# EAGLE board Open_Sesame_circuitboard (EAGLE 9.6.2)
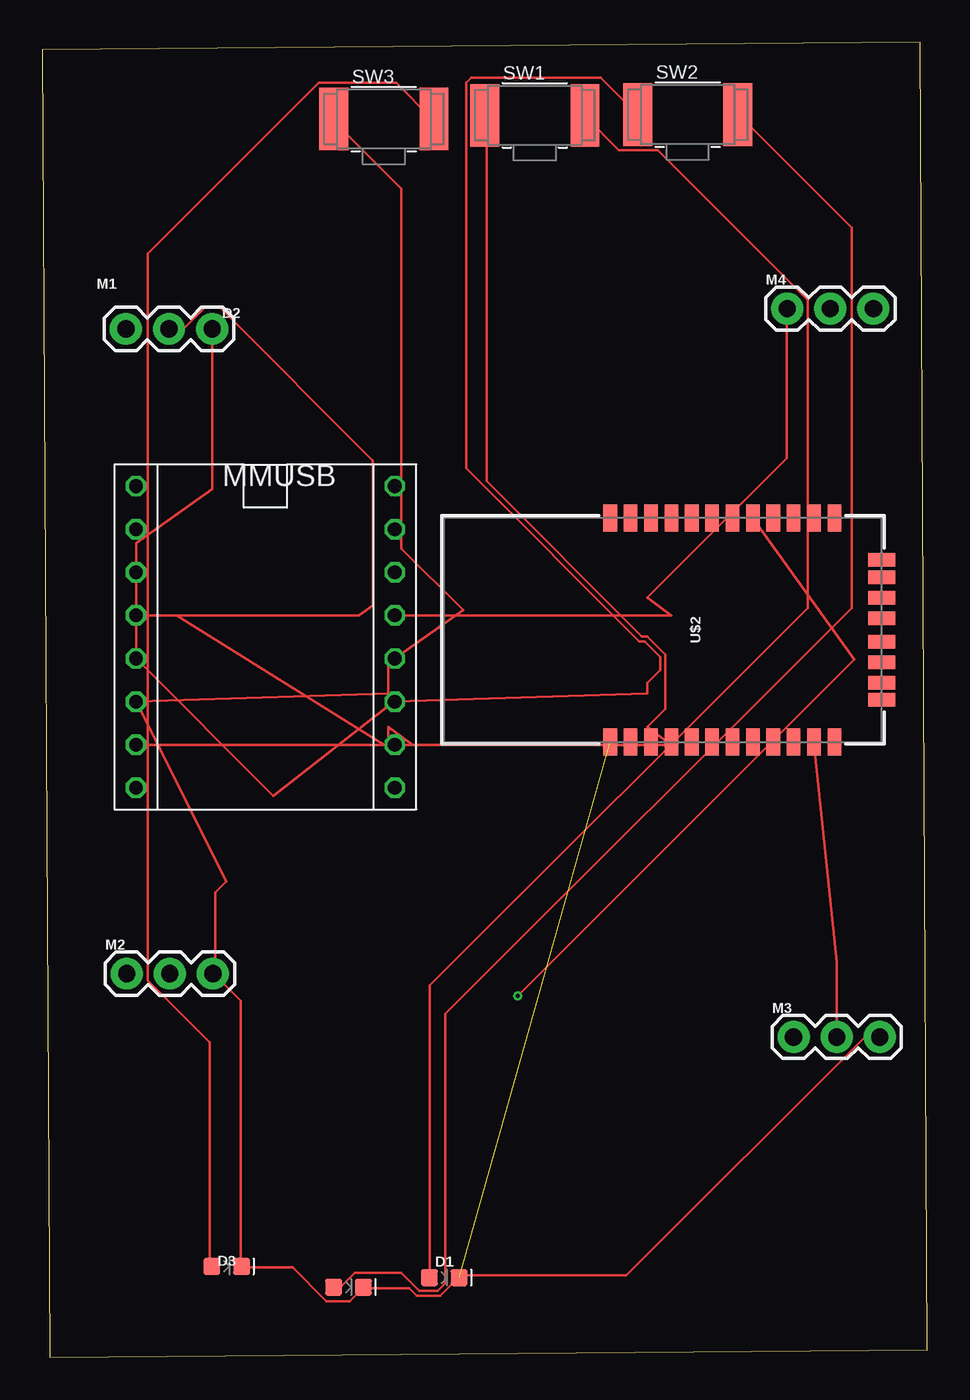
[diagram p0: board, top side]
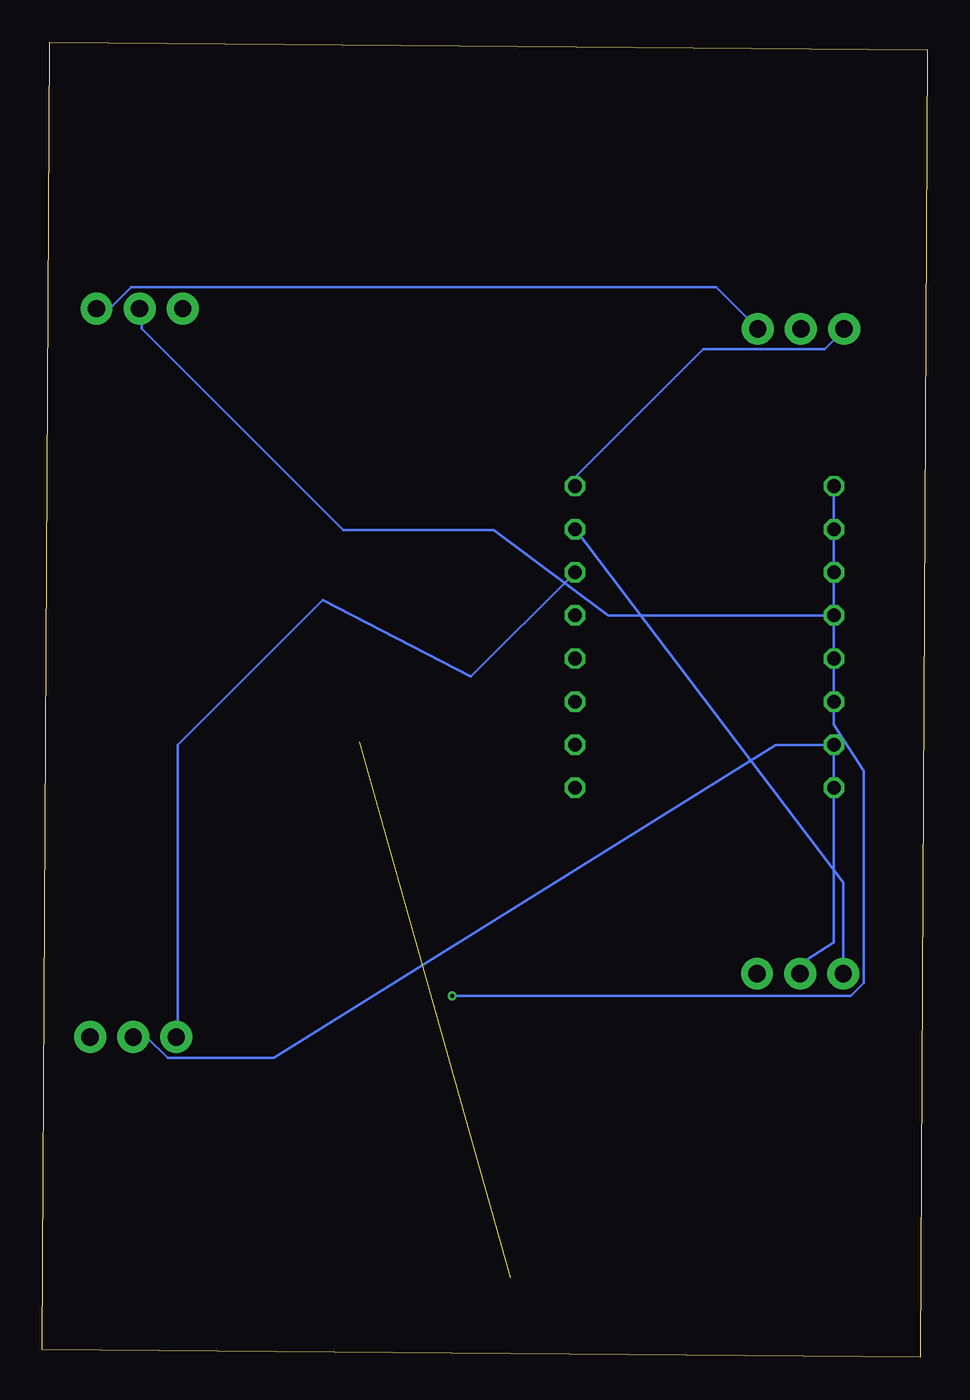
[diagram p1: board, bottom side, seen from below]

Size 52.12 x 77.45 mm. Coordinates in mm from the lower left corner, seen from the top.
Outline: 0.43,0 52.12,0.43 51.7,77.45 0,77.01 0.43,0
Copper layers (1*16): Top 0.035559375mm / dielectric 1.6mm / Bottom 0.035559375mm
Design rules "oshpark-2layer": minimum track width 6mil, minimum drill 10mil, track to track 6mil, track to pad 6mil, pad to pad 6mil, via to via 6mil, smd to smd 6mil, copper to edge 15mil, drill to drill 6mil, minimum pad ring 5mil, minimum via ring 5mil, stop-mask expansion 2.5mil, vias tented up to drill 0mil, thermal gap 10mil

## Footprints (pad centres in the part's own frame; a part is rotated, then mirrored left to right if it is on the bottom)
LED-0603 = smd 1 x 1: A -0.877,0; C 0.877,0
1X03 = drill 1.016 pad 1.88: 1 0,0; 2 2.54,0; 3 5.08,0
BTN_CK_KSS = smd 1.7 x 3.7: P$1 -2.95,0; P$2 2.95,0
VTC_LIB_METROMINISHEILD = drill 0.8 octagon: 3V -7.62,3.81; 5V -7.62,1.27; 6 7.62,-8.89; 7 7.62,-6.35; 8 7.62,-3.81; 9 7.62,-1.27; 10 7.62,1.27; 11 7.62,3.81; 12 7.62,6.35; 13 7.62,8.89; AREF -7.62,-8.89; GND -7.62,-1.27; GND2 -7.62,-3.81; RST -7.62,6.35; USB -7.62,8.89; VIN -7.62,-6.35
RN41 = smd 0.8 x 1.6: 1 -6.6,-6.6; 2 -5.4,-6.6; 3 -4.2,-6.6; 4 -3,-6.6; 5 -1.8,-6.6; 6 -0.6,-6.6; 7 0.6,-6.6; 8 1.8,-6.6; 9 3,-6.6; 10 4.2,-6.6; 11 5.4,-6.6; 12 6.6,-6.6; 13 6.6,6.6; 14 5.4,6.6; 15 4.2,6.6; 16 3,6.6; 17 1.8,6.6; 18 0.6,6.6; 19 -0.6,6.6; 20 -1.8,6.6; 21 -3,6.6; 22 -4.2,6.6; 23 -5.4,6.6; 24 -6.6,6.6 | smd 1.6 x 0.8: 28 9.4,3.1; 29 9.4,-3.1; 30 9.4,4.122; 31 9.4,1.9; 32 9.4,0.7; 33 9.4,-0.7; 34 9.4,-1.9; 35 9.4,-4.122

## Placement (x,y rotation side)
D1  Yellow  [LED-0603]  23.66,4.68 0 top
D2  Yellow  [LED-0603]  18.02,4.12 0 top
D3  Yellow  [LED-0603]  10.85,5.34 0 top
M1  SERVO  [1X03]  4.91,60.57 0 top
M2  SERVO  [1X03]  4.96,22.59 0 top
M3  SERVO  [1X03]  44.24,18.85 0 top
M4  SERVO  [1X03]  43.86,61.77 0 top
SW1  [BTN_CK_KSS]  29,73.15 0 top
SW2  [BTN_CK_KSS]  38,73.2 0 top
SW3  [BTN_CK_KSS]  20.11,72.94 0 top
U$1  VTC_LIB_METROMINISHIELD  [VTC_LIB_METROMINISHEILD]  13.13,42.42 0 top
U$2  BLUETOOTH-RN-41"  [RN41]  40.04,42.84 0 top

## Library data of the parts
D1-D3 = SparkFun-LED; PROD_ID: DIO-09003
M1-M4 = SparkFun-Electromechanical
SW1-SW3 = adafruit
U$1 = VTC_LIB
U$2 = SparkFun-RF; PROD_ID: IC-11844; SF_ID: WRL-12575

## Nets
+5V: M1.2 M2.2 M3.2 M4.2 U$1.5V U$1.VIN U$2.11
GND: D1.C D2.C D3.C M1.3 M2.3 M3.3 M4.3 U$1.GND U$1.GND2 U$2.1
N$1: M1.1 U$1.13
N$2: M2.1 U$1.12
N$3: D1.A SW1.P$2
N$4: SW2.P$1 U$1.8
N$5: D2.A SW2.P$2
N$6: SW3.P$1 U$1.9
N$7: D3.A SW3.P$2
N$8: M3.1 U$1.11
N$9: M4.1 U$1.10
N$11: U$1.USB U$2.17
PB: SW1.P$1 U$1.7

## Tracks (layer width: path | path; a pad name or v marks a point on that pad's centre or on a via)
+5V
  Top 0.152: U$1.VIN 21.79,36.07 20.37,37.13 20.37,35.91 7.9,43.69 U$1.5V 18.63,43.69 19.46,44.29 19.46,52.82 10.47,61.81 9.55,61.81 8.33,60.6 7.57,60.6 M1.2 | M3.2 46.78,23.28 U$2.11
  Bottom 0.152: M2.2 7.57,22.65 7.57,23.1 5.51,24.43 U$1.VIN 8.95,36.07 38.51,17.62 44.76,17.62 45.98,18.84 46.74,18.84 M3.2 | M4.2 46.28,61.66 46.28,60.6 34.39,48.71 25.55,48.71 18.8,43.69 U$1.5V
GND  (1 unrouted)
  Top 0.152: M3.3 49.18,18.84 48.41,18.84 34.39,4.82 24.64,4.82 D1.C 24.49,4.66 23.42,3.6 22.05,3.6 21.59,4.05 19,4.05 D2.C 18.85,4.05 18.09,3.29 16.72,3.29 14.73,5.27 11.84,5.27 D3.C 11.69,5.43 11.69,20.97 10.16,22.5 M2.3 10.16,22.65 10.16,27.37 10.82,28.03 U$1.GND2 20.37,39.1 20.37,40.78 | 20.37,38.34 13.6,33.06 U$1.GND 5.51,47.95 10.01,51.15 10.01,60.44 M1.3
  Bottom 0.152: M4.3 48.87,61.81 48.11,61.81 46.89,63.03 12.45,63.03 10.01,60.6 M1.3
N$1
  Bottom 0.152: U$1.13 20.97,51.62 13.21,59.38 6.05,59.38 4.98,60.44 M1.1
N$2
  Bottom 0.152: M2.1 4.96,27.95 U$1.12
N$3
  Top 0.152: D1.A 22.81,4.82 22.81,21.89 45.06,44.14 45.06,62.27 36.22,71.11 33.94,71.11 31.96,73.09 SW1.P$2
N$4
  Top 0.152: U$1.8 35.61,39.1 35.61,39.72 36.38,40.48 36.38,41.24 35.46,42.15 35.16,42.15 24.95,52.37 24.95,75.07 25.25,75.38 32.87,75.38 35,73.24 SW2.P$1
N$5
  Top 0.152: D2.A 17.17,4.21 17.63,4.21 18.39,4.97 21.14,4.97 22.2,3.9 23.27,3.9 23.73,4.36 23.73,20.21 47.65,44.14 47.65,66.54 41.1,73.09 SW2.P$2
N$6
  Top 0.152: U$1.9 24.77,44.01 21.14,47.64 21.14,68.82 17.17,72.79 SW3.P$1
N$7
  Top 0.152: D3.A 9.86,5.43 9.86,18.53 6.2,22.19 6.2,65.01 16.26,75.07 20.83,75.07 22.96,72.94 SW3.P$2
N$8
  Bottom 0.152: U$1.11 26.89,40.09 35.61,44.59 44.15,36.06 44.15,18.99 M3.1
N$9
  Top 0.152: U$1.10 37.03,43.69 35.61,44.75 43.84,52.98 43.84,61.66 M4.1
N$11  (via drill 0.25)
  Top 0.152: v27.99,21.28 47.81,41.09 U$2.17
  Bottom 0.152: v27.99,21.28 4.52,21.28 3.76,22.04 3.76,34.53 5.51,37.26 U$1.USB
PB
  Top 0.152: U$1.7 37.03,36.07 35.61,37.13 36.68,38.19 36.68,41.39 35.61,42.46 35.31,42.46 26.16,51.6 26.16,73.09 SW1.P$1